# Altium PCB ART_CARD Rev 5.PcbDoc (part 8 of 13)
Units mil, origin at the board's own origin, x right, y up, seen from the top; angles counter-clockwise.
Board outline 6600.39 x 3903.54 mil, 8 copper layers (Top, Inner Layer 2, Inner Layer 3, Inner Layer 4, Inner Layer 5, Inner Layer 6, Inner Layer 7, Bottom), stack 63.111 mil thick; 542 components, 382 nets, 2410 pads, 1433 vias.
Unrouted connection lines stored in the file: 1247.
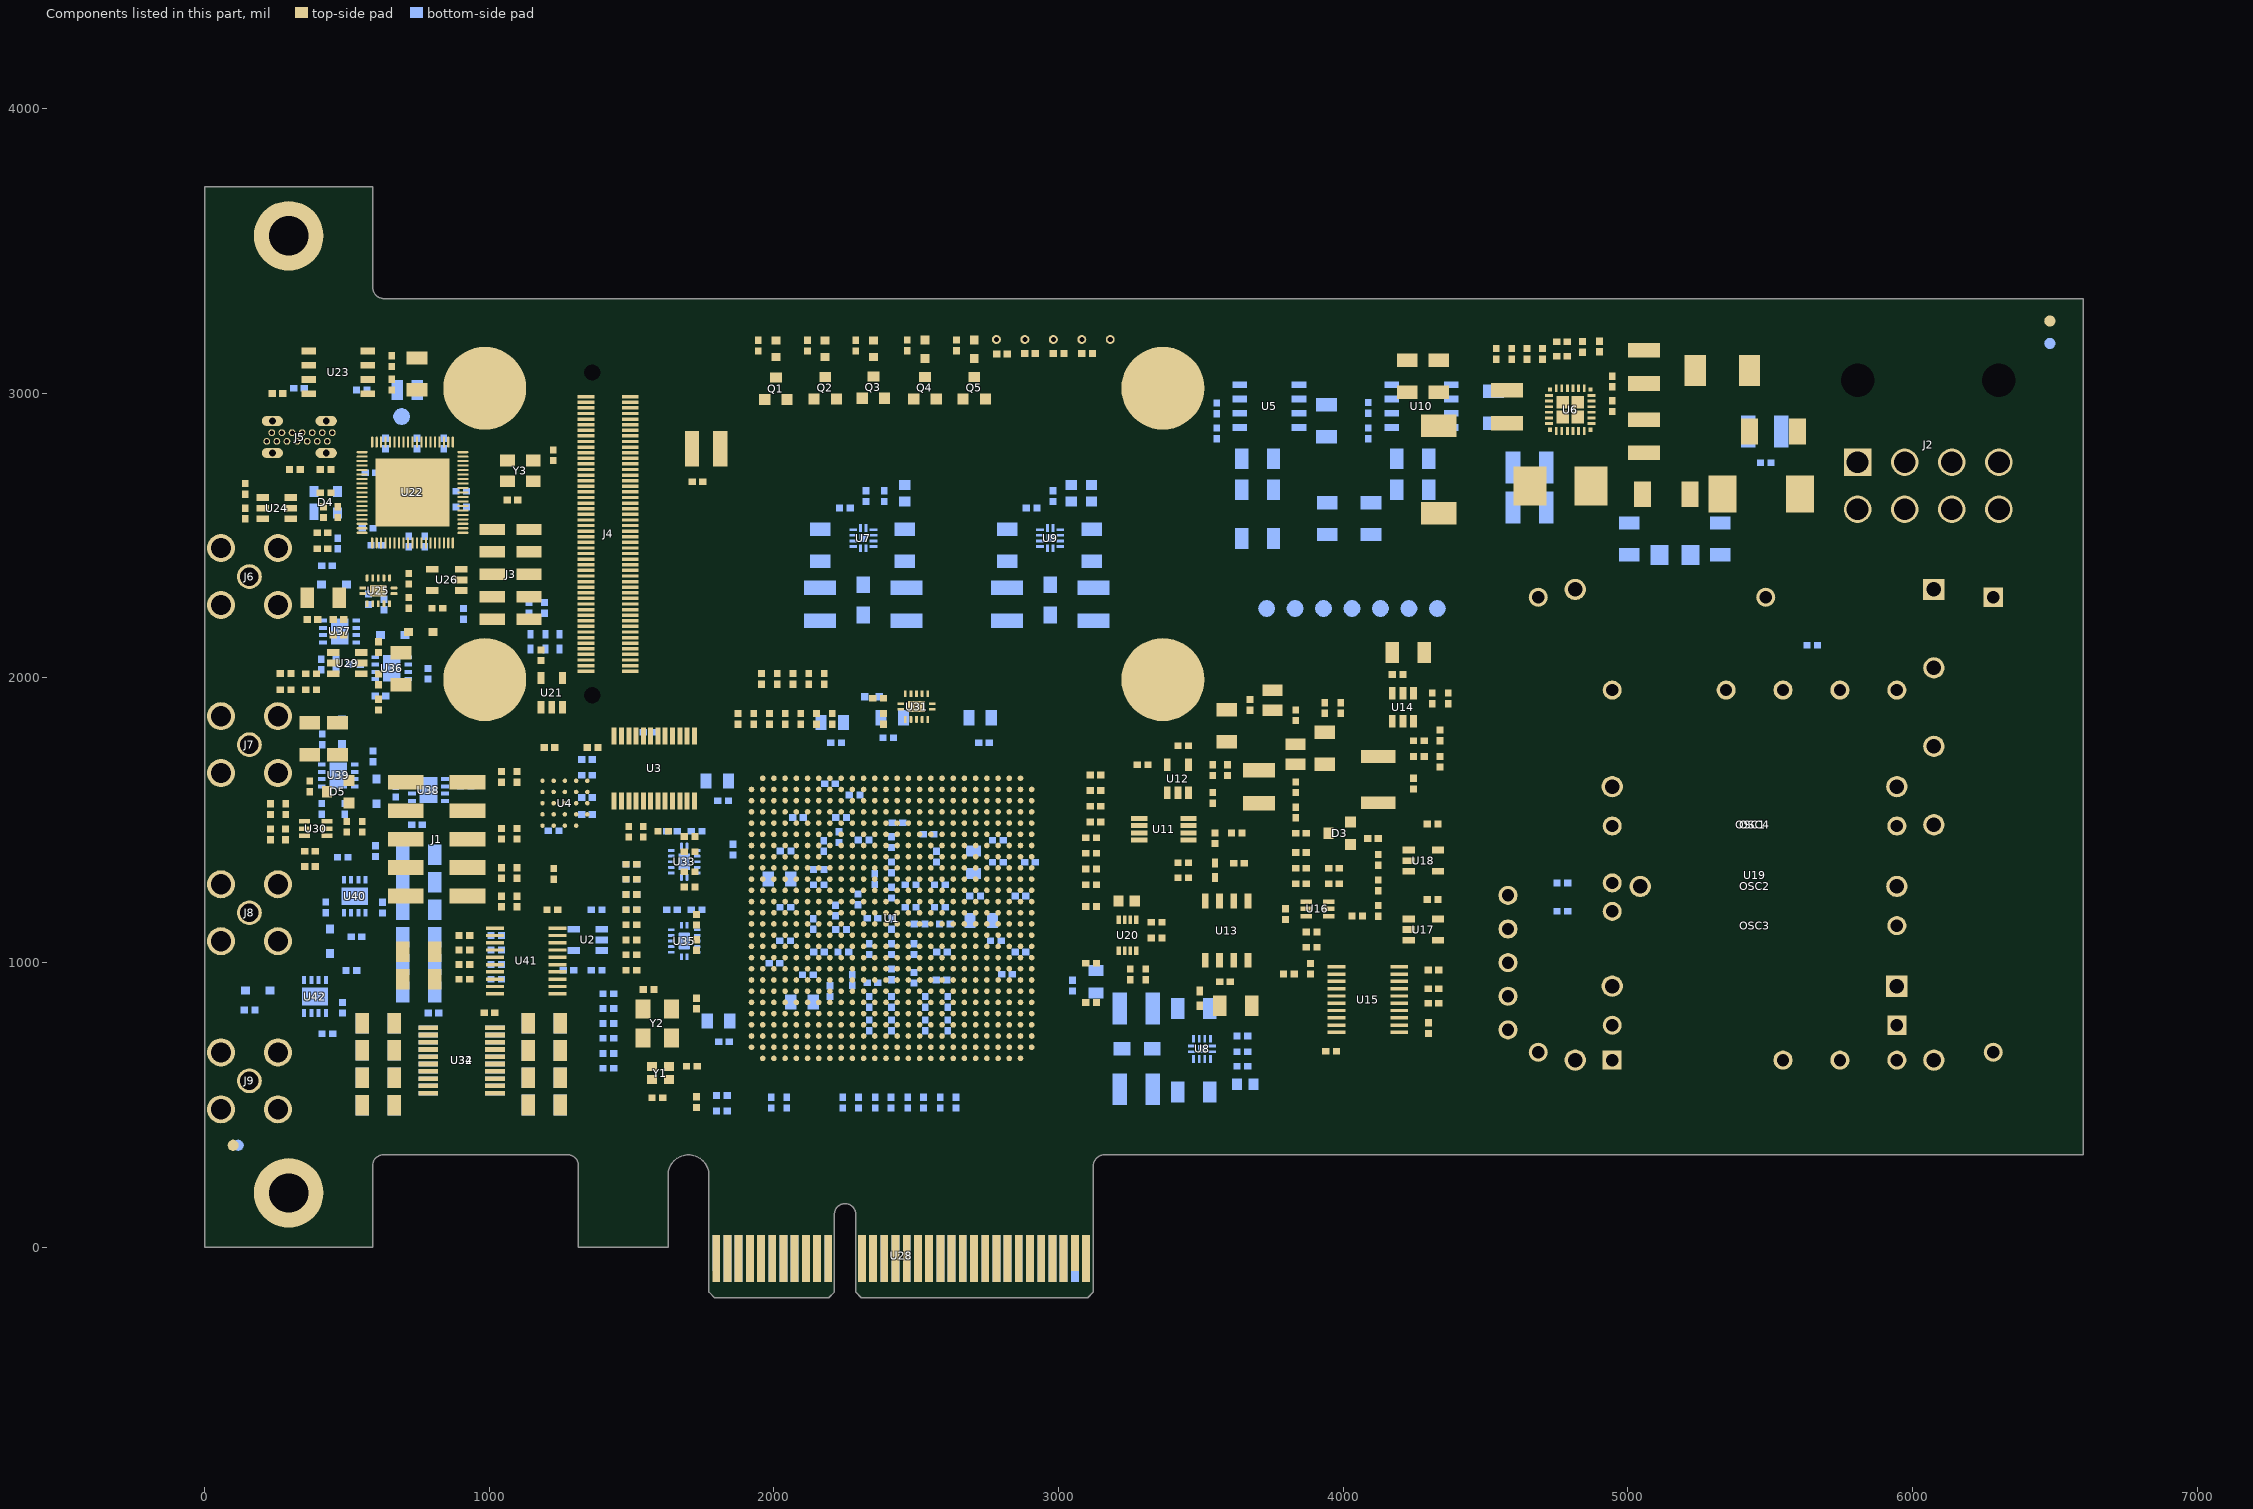
[diagram p14: the components of this part, seen from the top]

## Via types
v1: diameter 25.59, hole 11.81, Top to Bottom, 915 vias
v2: diameter 21.65, hole 9.84, Top to Bottom, 518 vias

## Nets (pads, with @x,y where several pads share a name; then routed paths per layer and width w, separated by ;. In a path a pad name is that pad's centre, name@x,y a point inside that pad or via, vN(x,y) a via of type N, cw(c..) or ccw(c..) an arc to the next point about the centre after c; other vN are vias at no path point) (continued)
copper on no net: (continued)
  Inner Layer 5 w12.2: -370.08,-267.72 -370.08,-263.78 ; -370.08,4023.62 -370.08,4027.56 ; -366.14,-248.03 -279.53,-248.03 ; -366.14,4043.31 -279.53,4043.31 ; -358.27,-232.28 -275.59,-232.28 ; -358.27,4059.06 -275.59,4059.06 ; -354.33,-220.47 -275.59,-220.47 ; -354.33,4070.87 -275.59,4070.87 ; -346.46,-212.6 -279.53,-212.6 -350.39,-212.6 -275.59,-212.6 ; -346.46,4078.74 -279.53,4078.74 -350.39,4078.74 -275.59,4078.74 ; -338.58,-200.79 -279.53,-200.79 -334.65,-200.79 ; -338.58,4090.55 -279.53,4090.55 -334.65,4090.55 ; -334.65,-196.85 -275.59,-196.85 ; -334.65,4094.49 -275.59,4094.49 ; -326.77,-196.85 -275.59,-196.85 ; -326.77,4094.49 -275.59,4094.49 ; -322.83,-196.85 -330.71,-196.85 -275.59,-196.85 ; -322.83,4094.49 -330.71,4094.49 -275.59,4094.49 ; -311.02,-185.04 -275.59,-185.04 -299.21,-185.04 -279.53,-185.04 ; -311.02,4106.3 -275.59,4106.3 -299.21,4106.3 -279.53,4106.3 ; -307.09,-185.04 -279.53,-185.04 ; -307.09,4106.3 -279.53,4106.3 ; -303.15,-185.04 -279.53,-185.04 ; -303.15,4106.3 -279.53,4106.3 ; -279.53,-255.91 -370.08,-255.91 ; -279.53,-244.09 -366.14,-244.09 -275.59,-244.09 ; -279.53,-236.22 -362.2,-236.22 -275.59,-236.22 ; -279.53,-224.41 -354.33,-224.41 -275.59,-224.41 ; -279.53,4035.43 -370.08,4035.43 ; -279.53,4047.24 -366.14,4047.24 -275.59,4047.24 ; -279.53,4055.12 -362.2,4055.12 -275.59,4055.12 ; -279.53,4066.93 -354.33,4066.93 -275.59,4066.93 ; -275.59,-338.58 -200.79,-338.58 ; -275.59,-326.77 -196.85,-326.77 ; -275.59,-318.9 -188.98,-318.9 ; -275.59,-307.09 -185.04,-307.09 ; -275.59,3952.76 -200.79,3952.76 ; -275.59,3964.57 -196.85,3964.57 ; -275.59,3972.44 -188.98,3972.44 ; -275.59,3984.25 -185.04,3984.25 ; -271.65,-358.27 -224.41,-358.27 ; -271.65,-346.46 -208.66,-346.46 ; -271.65,-342.52 -208.66,-342.52 ; -271.65,-334.65 -200.79,-334.65 ; -271.65,-287.4 -181.1,-287.4 ; -271.65,-283.46 -181.1,-283.46 ; -271.65,3933.07 -224.41,3933.07 ; -271.65,3944.88 -208.66,3944.88 ; -271.65,3948.82 -208.66,3948.82 ; -271.65,3956.69 -200.79,3956.69 ; -271.65,4003.94 -181.1,4003.94 ; -271.65,4007.87 -181.1,4007.87 ; -248.03,-366.14 -271.65,-366.14 ; -248.03,3925.2 -271.65,3925.2 ; -244.09,-366.14 -275.59,-366.14 ; -244.09,3925.2 -275.59,3925.2 ; -240.16,-362.2 -275.59,-362.2 ; -240.16,3929.13 -275.59,3929.13 ; -236.22,-362.2 -275.59,-362.2 ; -236.22,3929.13 -275.59,3929.13 ; -224.41,-354.33 -275.59,-354.33 -220.47,-354.33 -271.65,-354.33 -216.54,-354.33 ; -224.41,3937.01 -275.59,3937.01 -220.47,3937.01 -271.65,3937.01 -216.54,3937.01 ; -216.54,-350.39 -275.59,-350.39 -212.6,-350.39 ; -216.54,3940.94 -275.59,3940.94 -212.6,3940.94 ; -212.6,-346.46 -275.59,-346.46 ; -212.6,3944.88 -275.59,3944.88 ; -204.72,-342.52 -275.59,-342.52 ; -204.72,3948.82 -275.59,3948.82 ; -200.79,-330.71 -271.65,-330.71 -196.85,-330.71 ; -200.79,3960.63 -271.65,3960.63 -196.85,3960.63 ; -188.98,-307.09 -271.65,-307.09 ; -188.98,3984.25 -271.65,3984.25 ; -185.04,-287.4 -275.59,-287.4 ; -185.04,-283.46 -275.59,-283.46 ; -185.04,4003.94 -275.59,4003.94 ; -185.04,4007.87 -275.59,4007.87 ; 6795.28,3629.92 6795.28,3633.86 ; 6799.21,3649.61 6885.83,3649.61 ; 6807.09,3665.35 6889.76,3665.35 ; 6811.02,3677.17 6889.76,3677.17 ; 6818.9,3685.04 6885.83,3685.04 6814.96,3685.04 6889.76,3685.04 ; 6826.77,3696.85 6885.83,3696.85 6830.71,3696.85 ; 6830.71,3700.79 6889.76,3700.79 ; 6838.58,3700.79 6889.76,3700.79 ; 6842.52,3700.79 6834.65,3700.79 6889.76,3700.79 ; 6854.33,3712.6 6889.76,3712.6 6866.14,3712.6 6885.83,3712.6 ; 6858.27,3712.6 6885.83,3712.6 ; 6862.2,3712.6 6885.83,3712.6 ; 6885.83,3641.73 6795.28,3641.73 ; 6885.83,3653.54 6799.21,3653.54 6889.76,3653.54 ; 6885.83,3661.42 6803.15,3661.42 6889.76,3661.42 ; 6885.83,3673.23 6811.02,3673.23 6889.76,3673.23 ; 6889.76,3559.06 6964.57,3559.06 ; 6889.76,3570.87 6968.5,3570.87 ; 6889.76,3578.74 6976.38,3578.74 ; 6889.76,3590.55 6980.32,3590.55 ; 6893.7,3539.37 6940.94,3539.37 ; 6893.7,3551.18 6956.69,3551.18 ; 6893.7,3555.12 6956.69,3555.12 ; 6893.7,3562.99 6964.57,3562.99 ; 6893.7,3610.24 6984.25,3610.24 ; 6893.7,3614.17 6984.25,3614.17 ; 6917.32,3531.5 6893.7,3531.5 ; 6921.26,3531.5 6889.76,3531.5 ; 6925.2,3535.43 6889.76,3535.43 ; 6929.13,3535.43 6889.76,3535.43 ; 6940.94,3543.31 6889.76,3543.31 6944.88,3543.31 6893.7,3543.31 6948.82,3543.31 ; 6948.82,3547.24 6889.76,3547.24 6952.76,3547.24 ; 6952.76,3551.18 6889.76,3551.18 ; 6960.63,3555.12 6889.76,3555.12 ; 6964.57,3566.93 6893.7,3566.93 6968.5,3566.93 ; 6976.38,3590.55 6893.7,3590.55 ; 6980.32,3610.24 6889.76,3610.24 ; 6980.32,3614.17 6889.76,3614.17 ; -425.2,-275.59 -125.98,-275.59 ; -425.2,-275.59 -125.98,-275.59 ; -425.2,-275.59 -125.98,-275.59 ; -425.2,-275.59 -125.98,-275.59 ; -425.2,-275.59 -125.98,-275.59 ; -425.2,-275.59 -125.98,-275.59 ; -425.2,-275.59 -125.98,-275.59 ; -425.2,-275.59 -125.98,-275.59 ; -425.2,-275.59 -125.98,-275.59 ; -425.2,-275.59 -125.98,-275.59 ; -425.2,4015.75 -125.98,4015.75 ; -425.2,4015.75 -125.98,4015.75 ; -425.2,4015.75 -125.98,4015.75 ; -425.2,4015.75 -125.98,4015.75 ; -425.2,4015.75 -125.98,4015.75 ; -425.2,4015.75 -125.98,4015.75 ; -425.2,4015.75 -125.98,4015.75 ; -425.2,4015.75 -125.98,4015.75 ; -425.2,4015.75 -125.98,4015.75 ; -425.2,4015.75 -125.98,4015.75 ; -370.08,-263.78 -275.59,-263.78 ; -370.08,-263.78 -279.53,-263.78 -370.08,-263.78 ; -370.08,-263.78 -275.59,-263.78 ; -370.08,-263.78 -275.59,-263.78 ; -370.08,-263.78 -275.59,-263.78 ; -370.08,-263.78 -275.59,-263.78 ; -370.08,-263.78 -275.59,-263.78 ; -370.08,-263.78 -275.59,-263.78 ; -370.08,-263.78 -275.59,-263.78 ; -370.08,-255.91 -275.59,-255.91 -370.08,-255.91 ; -370.08,-251.97 -279.53,-251.97 ; -370.08,-251.97 -279.53,-251.97 ; -370.08,-251.97 -279.53,-251.97 ; -370.08,-251.97 -275.59,-251.97 -370.08,-251.97 ; -370.08,4027.56 -275.59,4027.56 ; -370.08,4027.56 -279.53,4027.56 -370.08,4027.56 ; -370.08,4027.56 -275.59,4027.56 ; -370.08,4027.56 -275.59,4027.56 ; -370.08,4027.56 -275.59,4027.56 ; -370.08,4027.56 -275.59,4027.56 ; -370.08,4027.56 -275.59,4027.56 ; -370.08,4027.56 -275.59,4027.56 ; -370.08,4027.56 -275.59,4027.56 ; -370.08,4035.43 -275.59,4035.43 -370.08,4035.43 ; -370.08,4039.37 -279.53,4039.37 ; -370.08,4039.37 -279.53,4039.37 ; -370.08,4039.37 -279.53,4039.37 ; -370.08,4039.37 -275.59,4039.37 -370.08,4039.37 ; -366.14,-240.16 -279.53,-240.16 ; -366.14,-240.16 -279.53,-240.16 ; -366.14,-240.16 -275.59,-240.16 ; -366.14,-240.16 -275.59,-240.16 ; -366.14,4051.18 -279.53,4051.18 ; -366.14,4051.18 -279.53,4051.18 ; -366.14,4051.18 -275.59,4051.18 ; -366.14,4051.18 -275.59,4051.18 ; -362.2,-240.16 -279.53,-240.16 ; -362.2,-240.16 -279.53,-240.16 ; -362.2,-240.16 -275.59,-240.16 ; -362.2,4051.18 -279.53,4051.18 ; -362.2,4051.18 -279.53,4051.18 ; -362.2,4051.18 -275.59,4051.18 ; -358.27,-228.35 -279.53,-228.35 ; -358.27,-228.35 -279.53,-228.35 ; -358.27,-228.35 -279.53,-228.35 ; -358.27,-228.35 -279.53,-228.35 ; -358.27,-228.35 -275.59,-228.35 -358.27,-228.35 ; -358.27,-228.35 -279.53,-228.35 ; -358.27,4062.99 -279.53,4062.99 ; -358.27,4062.99 -279.53,4062.99 ; -358.27,4062.99 -279.53,4062.99 ; -358.27,4062.99 -279.53,4062.99 ; -358.27,4062.99 -275.59,4062.99 -358.27,4062.99 ; -358.27,4062.99 -279.53,4062.99 ; -350.39,-216.54 -279.53,-216.54 ; -350.39,-216.54 -279.53,-216.54 ; -350.39,-216.54 -279.53,-216.54 ; -350.39,-216.54 -275.59,-216.54 -354.33,-216.54 -279.53,-216.54 ; -350.39,-216.54 -279.53,-216.54 ; -350.39,4074.8 -279.53,4074.8 ; -350.39,4074.8 -279.53,4074.8 ; -350.39,4074.8 -279.53,4074.8 ; -350.39,4074.8 -275.59,4074.8 -354.33,4074.8 -279.53,4074.8 ; -350.39,4074.8 -279.53,4074.8 ; -342.52,-204.72 -279.53,-204.72 ; -342.52,-204.72 -279.53,-204.72 ; -342.52,-204.72 -279.53,-204.72 ; -342.52,-204.72 -275.59,-204.72 ; -342.52,-204.72 -279.53,-204.72 ; -342.52,-204.72 -275.59,-204.72 ; -342.52,4086.61 -279.53,4086.61 ; -342.52,4086.61 -279.53,4086.61 ; -342.52,4086.61 -279.53,4086.61 ; -342.52,4086.61 -275.59,4086.61 ; -342.52,4086.61 -279.53,4086.61 ; -342.52,4086.61 -275.59,4086.61 ; -322.83,-192.91 -279.53,-192.91 ; -322.83,-192.91 -279.53,-192.91 ; -322.83,-192.91 -279.53,-192.91 ; -322.83,4098.43 -279.53,4098.43 ; -322.83,4098.43 -279.53,4098.43 ; -322.83,4098.43 -279.53,4098.43 ; -318.9,-188.98 -279.53,-188.98 ; -318.9,-188.98 -279.53,-188.98 ; -318.9,-188.98 -275.59,-188.98 -311.02,-188.98 -279.53,-188.98 ; -318.9,4102.36 -279.53,4102.36 ; -318.9,4102.36 -279.53,4102.36 ; -318.9,4102.36 -275.59,4102.36 -311.02,4102.36 -279.53,4102.36 ; -279.53,-251.97 -366.14,-251.97 -279.53,-251.97 ; -279.53,-204.72 -338.58,-204.72 -275.59,-204.72 ; -279.53,-192.91 -326.77,-192.91 -279.53,-192.91 ; -279.53,4039.37 -366.14,4039.37 -279.53,4039.37 ; -279.53,4086.61 -338.58,4086.61 -275.59,4086.61 ; -279.53,4098.43 -326.77,4098.43 -279.53,4098.43 ; -275.59,-425.2 -275.59,-125.98 ; -275.59,-425.2 -275.59,-125.98 ; -275.59,-425.2 -275.59,-125.98 ; -275.59,-425.2 -275.59,-125.98 ; -275.59,-425.2 -275.59,-125.98 ; -275.59,-425.2 -275.59,-125.98 ; -275.59,-425.2 -275.59,-125.98 ; -275.59,-425.2 -275.59,-125.98 ; -275.59,-425.2 -275.59,-125.98 ; -275.59,-425.2 -275.59,-125.98 ; -275.59,-366.14 -240.16,-366.14 -271.65,-366.14 ; -275.59,-366.14 -251.97,-366.14 -271.65,-366.14 ; -275.59,-362.2 -232.28,-362.2 -275.59,-362.2 ; -275.59,-358.27 -224.41,-358.27 ; -275.59,-358.27 -224.41,-358.27 ; -275.59,-358.27 -224.41,-358.27 ; -275.59,-346.46 -208.66,-346.46 ; -275.59,-346.46 -208.66,-346.46 ; -275.59,-346.46 -208.66,-346.46 ; -275.59,-342.52 -208.66,-342.52 ; -275.59,-342.52 -208.66,-342.52 ; -275.59,-334.65 -200.79,-334.65 ; -275.59,-334.65 -200.79,-334.65 ; -275.59,-334.65 -200.79,-334.65 ; -275.59,-334.65 -200.79,-334.65 ; -275.59,-330.71 -196.85,-330.71 ; -275.59,-330.71 -196.85,-330.71 ; -275.59,-330.71 -196.85,-330.71 ; -275.59,-322.83 -192.91,-322.83 ; -275.59,-322.83 -192.91,-322.83 ; -275.59,-322.83 -192.91,-322.83 ; -275.59,-311.02 -185.04,-311.02 ; -275.59,-311.02 -188.98,-311.02 -271.65,-311.02 -185.04,-311.02 ; -275.59,-311.02 -185.04,-311.02 ; -275.59,-287.4 -181.1,-287.4 ; -275.59,-287.4 -181.1,-287.4 ; -275.59,-287.4 -181.1,-287.4 ; -275.59,-283.46 -181.1,-283.46 ; -275.59,-283.46 -181.1,-283.46 ; -275.59,-283.46 -181.1,-283.46 ; -275.59,3866.14 -275.59,4165.35 ; -275.59,3866.14 -275.59,4165.35 ; -275.59,3866.14 -275.59,4165.35 ; -275.59,3866.14 -275.59,4165.35 ; -275.59,3866.14 -275.59,4165.35 ; -275.59,3866.14 -275.59,4165.35 ; -275.59,3866.14 -275.59,4165.35 ; -275.59,3866.14 -275.59,4165.35 ; -275.59,3866.14 -275.59,4165.35 ; -275.59,3866.14 -275.59,4165.35 ; -275.59,3925.2 -240.16,3925.2 -271.65,3925.2 ; -275.59,3925.2 -251.97,3925.2 -271.65,3925.2 ; -275.59,3929.13 -232.28,3929.13 -275.59,3929.13 ; -275.59,3933.07 -224.41,3933.07 ; -275.59,3933.07 -224.41,3933.07 ; -275.59,3933.07 -224.41,3933.07 ; -275.59,3944.88 -208.66,3944.88 ; -275.59,3944.88 -208.66,3944.88 ; -275.59,3944.88 -208.66,3944.88 ; -275.59,3948.82 -208.66,3948.82 ; -275.59,3948.82 -208.66,3948.82 ; -275.59,3956.69 -200.79,3956.69 ; -275.59,3956.69 -200.79,3956.69 ; -275.59,3956.69 -200.79,3956.69 ; -275.59,3956.69 -200.79,3956.69 ; -275.59,3960.63 -196.85,3960.63 ; -275.59,3960.63 -196.85,3960.63 ; -275.59,3960.63 -196.85,3960.63 ; -275.59,3968.5 -192.91,3968.5 ; -275.59,3968.5 -192.91,3968.5 ; -275.59,3968.5 -192.91,3968.5 ; -275.59,3980.31 -185.04,3980.31 ; -275.59,3980.31 -188.98,3980.31 -271.65,3980.31 -185.04,3980.31 ; -275.59,3980.31 -185.04,3980.31 ; -275.59,4003.94 -181.1,4003.94 ; -275.59,4003.94 -181.1,4003.94 ; -275.59,4003.94 -181.1,4003.94 ; -275.59,4007.87 -181.1,4007.87 ; -275.59,4007.87 -181.1,4007.87 ; -275.59,4007.87 -181.1,4007.87 ; -271.65,-318.9 -188.98,-318.9 ; -271.65,-318.9 -188.98,-318.9 ; -271.65,-318.9 -188.98,-318.9 ; -271.65,-318.9 -188.98,-318.9 ; -271.65,-307.09 -185.04,-307.09 ; -271.65,-307.09 -185.04,-307.09 ; -271.65,-307.09 -185.04,-307.09 ; -271.65,-299.21 -181.1,-299.21 ; -271.65,-299.21 -181.1,-299.21 ; -271.65,-299.21 -181.1,-299.21 ; -271.65,-295.28 -181.1,-295.28 ; -271.65,-295.28 -181.1,-295.28 ; -271.65,-295.28 -181.1,-295.28 ; -271.65,3972.44 -188.98,3972.44 ; -271.65,3972.44 -188.98,3972.44 ; -271.65,3972.44 -188.98,3972.44 ; -271.65,3972.44 -188.98,3972.44 ; -271.65,3984.25 -185.04,3984.25 ; -271.65,3984.25 -185.04,3984.25 ; -271.65,3984.25 -185.04,3984.25 ; -271.65,3992.13 -181.1,3992.13 ; -271.65,3992.13 -181.1,3992.13 ; -271.65,3992.13 -181.1,3992.13 ; -271.65,3996.06 -181.1,3996.06 ; -271.65,3996.06 -181.1,3996.06 ; -271.65,3996.06 -181.1,3996.06 ; -200.79,-334.65 -196.85,-330.71 ; -200.79,3956.69 -196.85,3960.63 ; -192.91,-322.83 -271.65,-322.83 -192.91,-322.83 ; -192.91,3968.5 -271.65,3968.5 -192.91,3968.5 ; -181.1,-299.21 -275.59,-299.21 -181.1,-299.21 ; -181.1,-295.28 -275.59,-295.28 -181.1,-295.28 ; -181.1,3992.13 -275.59,3992.13 -181.1,3992.13 ; -181.1,3996.06 -275.59,3996.06 -181.1,3996.06 ; -177.17,-275.59 ccw(c-275.59,-275.59) -177.17,-275.59 ; -177.17,-275.59 ccw(c-275.59,-275.59) -177.17,-275.59 ; -177.17,-275.59 ccw(c-275.59,-275.59) -177.17,-275.59 ; -177.17,-275.59 ccw(c-275.59,-275.59) -177.17,-275.59 ; -177.17,-275.59 ccw(c-275.59,-275.59) -177.17,-275.59 ; -177.17,-275.59 ccw(c-275.59,-275.59) -177.17,-275.59 ; -177.17,-275.59 ccw(c-275.59,-275.59) -177.17,-275.59 ; -177.17,-275.59 ccw(c-275.59,-275.59) -177.17,-275.59 ; -177.17,-275.59 ccw(c-275.59,-275.59) -177.17,-275.59 ; -177.17,-275.59 ccw(c-275.59,-275.59) -177.17,-275.59 ; -177.17,4015.75 ccw(c-275.59,4015.75) -177.17,4015.75 ; -177.17,4015.75 ccw(c-275.59,4015.75) -177.17,4015.75 ; -177.17,4015.75 ccw(c-275.59,4015.75) -177.17,4015.75 ; -177.17,4015.75 ccw(c-275.59,4015.75) -177.17,4015.75 ; -177.17,4015.75 ccw(c-275.59,4015.75) -177.17,4015.75 ; -177.17,4015.75 ccw(c-275.59,4015.75) -177.17,4015.75 ; -177.17,4015.75 ccw(c-275.59,4015.75) -177.17,4015.75 ; -177.17,4015.75 ccw(c-275.59,4015.75) -177.17,4015.75 ; -177.17,4015.75 ccw(c-275.59,4015.75) -177.17,4015.75 ; -177.17,4015.75 ccw(c-275.59,4015.75) -177.17,4015.75 ; 6740.16,3622.05 7039.37,3622.05 ; 6740.16,3622.05 7039.37,3622.05 ; 6740.16,3622.05 7039.37,3622.05 ; 6740.16,3622.05 7039.37,3622.05 ; 6740.16,3622.05 7039.37,3622.05 ; 6740.16,3622.05 7039.37,3622.05 ; 6740.16,3622.05 7039.37,3622.05 ; 6740.16,3622.05 7039.37,3622.05 ; 6740.16,3622.05 7039.37,3622.05 ; 6740.16,3622.05 7039.37,3622.05 ; 6795.28,3633.86 6889.76,3633.86 ; 6795.28,3633.86 6885.83,3633.86 6795.28,3633.86 ; 6795.28,3633.86 6889.76,3633.86 ; 6795.28,3633.86 6889.76,3633.86 ; 6795.28,3633.86 6889.76,3633.86 ; 6795.28,3633.86 6889.76,3633.86 ; 6795.28,3633.86 6889.76,3633.86 ; 6795.28,3633.86 6889.76,3633.86 ; 6795.28,3633.86 6889.76,3633.86 ; 6795.28,3641.73 6889.76,3641.73 6795.28,3641.73 ; 6795.28,3645.67 6885.83,3645.67 ; 6795.28,3645.67 6885.83,3645.67 ; 6795.28,3645.67 6885.83,3645.67 ; 6795.28,3645.67 6889.76,3645.67 6795.28,3645.67 ; 6799.21,3657.48 6885.83,3657.48 ; 6799.21,3657.48 6885.83,3657.48 ; 6799.21,3657.48 6889.76,3657.48 ; 6799.21,3657.48 6889.76,3657.48 ; 6803.15,3657.48 6885.83,3657.48 ; 6803.15,3657.48 6885.83,3657.48 ; 6803.15,3657.48 6889.76,3657.48 ; 6807.09,3669.29 6885.83,3669.29 ; 6807.09,3669.29 6885.83,3669.29 ; 6807.09,3669.29 6885.83,3669.29 ; 6807.09,3669.29 6885.83,3669.29 ; 6807.09,3669.29 6889.76,3669.29 6807.09,3669.29 ; 6807.09,3669.29 6885.83,3669.29 ; 6814.96,3681.1 6885.83,3681.1 ; 6814.96,3681.1 6885.83,3681.1 ; 6814.96,3681.1 6885.83,3681.1 ; 6814.96,3681.1 6889.76,3681.1 6811.02,3681.1 6885.83,3681.1 ; 6814.96,3681.1 6885.83,3681.1 ; 6822.83,3692.91 6885.83,3692.91 ; 6822.83,3692.91 6885.83,3692.91 ; 6822.83,3692.91 6885.83,3692.91 ; 6822.83,3692.91 6889.76,3692.91 ; 6822.83,3692.91 6885.83,3692.91 ; 6822.83,3692.91 6889.76,3692.91 ; 6842.52,3704.72 6885.83,3704.72 ; 6842.52,3704.72 6885.83,3704.72 ; 6842.52,3704.72 6885.83,3704.72 ; 6846.46,3708.66 6885.83,3708.66 ; 6846.46,3708.66 6885.83,3708.66 ; 6846.46,3708.66 6889.76,3708.66 6854.33,3708.66 6885.83,3708.66 ; 6885.83,3645.67 6799.21,3645.67 6885.83,3645.67 ; 6885.83,3692.91 6826.77,3692.91 6889.76,3692.91 ; 6885.83,3704.72 6838.58,3704.72 6885.83,3704.72 ; 6889.76,3472.44 6889.76,3771.65 ; 6889.76,3472.44 6889.76,3771.65 ; 6889.76,3472.44 6889.76,3771.65 ; 6889.76,3472.44 6889.76,3771.65 ; 6889.76,3472.44 6889.76,3771.65 ; 6889.76,3472.44 6889.76,3771.65 ; 6889.76,3472.44 6889.76,3771.65 ; 6889.76,3472.44 6889.76,3771.65 ; 6889.76,3472.44 6889.76,3771.65 ; 6889.76,3472.44 6889.76,3771.65 ; 6889.76,3531.5 6925.2,3531.5 6893.7,3531.5 ; 6889.76,3531.5 6913.39,3531.5 6893.7,3531.5 ; 6889.76,3535.43 6933.07,3535.43 6889.76,3535.43 ; 6889.76,3539.37 6940.94,3539.37 ; 6889.76,3539.37 6940.94,3539.37 ; 6889.76,3539.37 6940.94,3539.37 ; 6889.76,3551.18 6956.69,3551.18 ; 6889.76,3551.18 6956.69,3551.18 ; 6889.76,3551.18 6956.69,3551.18 ; 6889.76,3555.12 6956.69,3555.12 ; 6889.76,3555.12 6956.69,3555.12 ; 6889.76,3562.99 6964.57,3562.99 ; 6889.76,3562.99 6964.57,3562.99 ; 6889.76,3562.99 6964.57,3562.99 ; 6889.76,3562.99 6964.57,3562.99 ; 6889.76,3566.93 6968.5,3566.93 ; 6889.76,3566.93 6968.5,3566.93 ; 6889.76,3566.93 6968.5,3566.93 ; 6889.76,3574.8 6972.44,3574.8 ; 6889.76,3574.8 6972.44,3574.8 ; 6889.76,3574.8 6972.44,3574.8 ; 6889.76,3586.61 6980.32,3586.61 ; 6889.76,3586.61 6976.38,3586.61 6893.7,3586.61 6980.32,3586.61 ; 6889.76,3586.61 6980.32,3586.61 ; 6889.76,3610.24 6984.25,3610.24 ; 6889.76,3610.24 6984.25,3610.24 ; 6889.76,3610.24 6984.25,3610.24 ; 6889.76,3614.17 6984.25,3614.17 ; 6889.76,3614.17 6984.25,3614.17 ; 6889.76,3614.17 6984.25,3614.17 ; 6893.7,3578.74 6976.38,3578.74 ; 6893.7,3578.74 6976.38,3578.74 ; 6893.7,3578.74 6976.38,3578.74 ; 6893.7,3578.74 6976.38,3578.74 ; 6893.7,3590.55 6980.32,3590.55 ; 6893.7,3590.55 6980.32,3590.55 ; 6893.7,3590.55 6980.32,3590.55 ; 6893.7,3598.43 6984.25,3598.43 ; 6893.7,3598.43 6984.25,3598.43 ; 6893.7,3598.43 6984.25,3598.43 ; 6893.7,3602.36 6984.25,3602.36 ; 6893.7,3602.36 6984.25,3602.36 ; 6893.7,3602.36 6984.25,3602.36 ; 6964.57,3562.99 6968.5,3566.93 ; 6972.44,3574.8 6893.7,3574.8 6972.44,3574.8 ; 6984.25,3598.43 6889.76,3598.43 6984.25,3598.43 ; 6984.25,3602.36 6889.76,3602.36 6984.25,3602.36 ; 6988.19,3622.05 ccw(c6889.76,3622.05) 6988.19,3622.05 ; 6988.19,3622.05 ccw(c6889.76,3622.05) 6988.19,3622.05 ; 6988.19,3622.05 ccw(c6889.76,3622.05) 6988.19,3622.05 ; 6988.19,3622.05 ccw(c6889.76,3622.05) 6988.19,3622.05 ; 6988.19,3622.05 ccw(c6889.76,3622.05) 6988.19,3622.05 ; 6988.19,3622.05 ccw(c6889.76,3622.05) 6988.19,3622.05 ; 6988.19,3622.05 ccw(c6889.76,3622.05) 6988.19,3622.05 ; 6988.19,3622.05 ccw(c6889.76,3622.05) 6988.19,3622.05 ; 6988.19,3622.05 ccw(c6889.76,3622.05) 6988.19,3622.05 ; 6988.19,3622.05 ccw(c6889.76,3622.05) 6988.19,3622.05
  Inner Layer 6 w10: 4173.23,-590.55 6082.68,-590.55 ; 5551.18,-708.66 5551.18,-472.44 ; 4173.23,-708.66 4173.23,-472.44 6082.68,-472.44 6082.68,-708.66 4173.23,-708.66